# Altium PCB v0.0.1.PcbDoc
Units mm, origin at the board's own origin, x right, y up, seen from the top; angles counter-clockwise.
Board outline 75 x 75 mm, 2 copper layers (Top Layer, Bottom Layer); 65 components, 42 nets, 261 pads, 0 vias.
Unrouted connection lines stored in the file: 170.
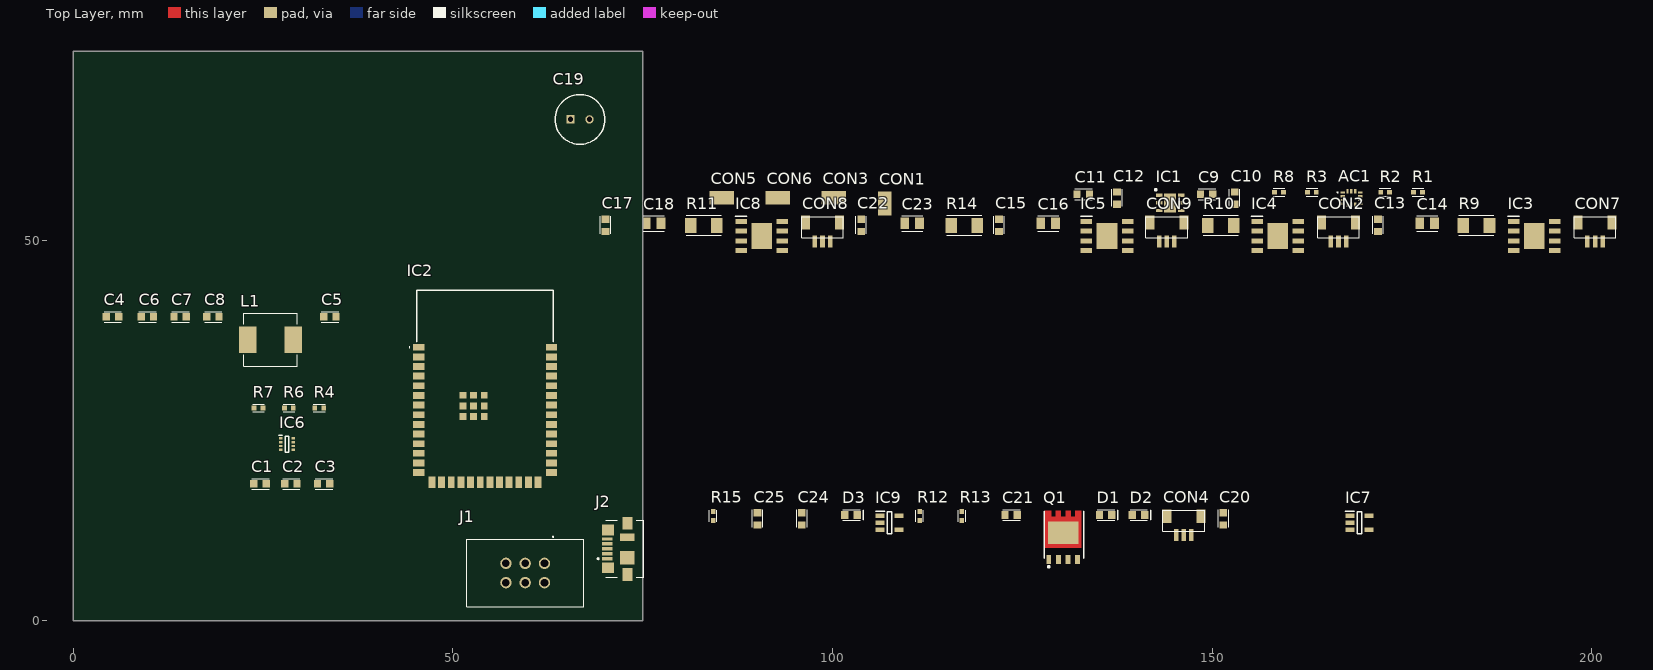
[diagram p0: Top Layer view]
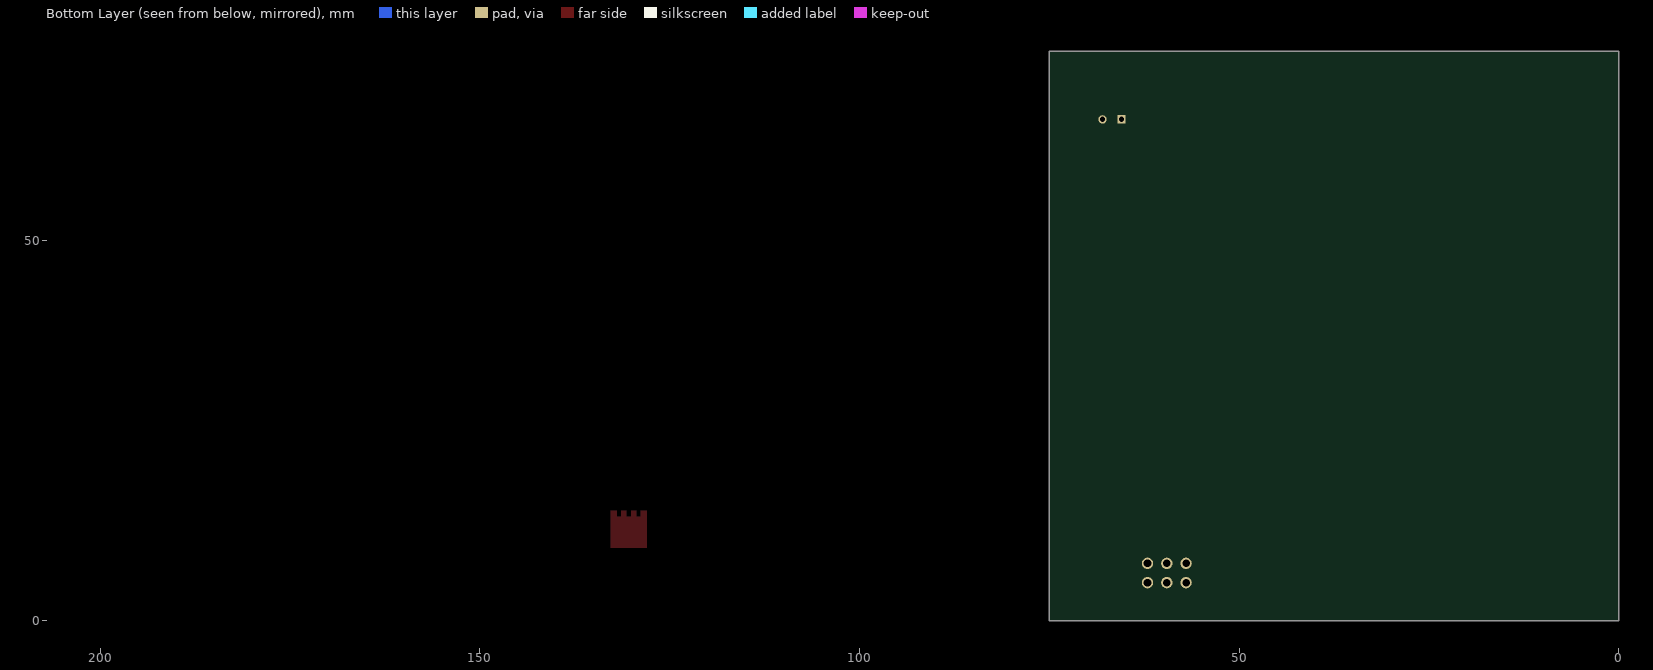
[diagram p1: Bottom Layer view, seen from below]

## Layer stack, top to bottom
Top Solder: solder mask 0.0102, Solder Resist, Dk 3.5
Top Layer: signal copper 0.0356
Dielectric 1: dielectric 0.32, FR-4, Dk 4.8
Bottom Layer: signal copper 0.0356
Bottom Solder: solder mask 0.0102, Solder Resist, Dk 3.5

## Board outline
0,0 75,0 75,75 0,75

## Design rules (kind name [scope] priority, off if disabled: settings)
BoardOutlineClearance [All] p1: gap=0.8 ignorepadtopadclearanceinfootprint=FALSE
Clearance [All] p1: gap=0.127 ignorepadtopadclearanceinfootprint=TRUE except(0.2: Arc-THPad Track-THPad SMDPad-THPad; 0.254: THPad-Fill THPad-Poly THPad-Region Via-Fill Via-Poly Via-Region; 0.33: Arc-Hole Track-Hole SMDPad-Hole THPad-Hole Via-Hole Fill-Hole Poly-Hole Region-Hole; 0.5: THPad-THPad)
HoleSize [All] p1: absolutevalues=TRUE maxlimit=4 minlimit=0.02 maxpercent=80.000 minpercent=20.000
HoleToHoleClearance [All] p1: gap=0.127 allowstackedmicrovias=TRUE
PlaneClearance [All] p1: clearance=0.3
PlaneConnect PlaneConnect_1 [(HasFootprint('R 2512'))] p1: planeconnectstyle=Relief reliefexpansion=0.508 reliefentries=4 reliefconductorwidth=0.254 reliefairgap=0.254
PlaneConnect [All] p2: planeconnectstyle=Relief reliefexpansion=0.508 reliefentries=4 reliefconductorwidth=0.254 reliefairgap=0.254
PolygonConnect "Polygon Power Connection" [(HasFootprint('DFN 5x6')) OR  (HasFootprint('R 2512')) OR  IsVia OR  HasFootprint('SMD PAD')  OR  (HasFootprint('DJNR60454R5FERROCORE'))  OR  (HasFootprint ('SON50P200X200X80-9N-D')) OR (HasFootprint('SOT230P700X180-4N'))  OR    InNetClass('Power')] p1: connectstyle=Direct reliefconductorwidth=0.254 reliefentries=4 polygonreliefangle="90 Angle" airgapwidth=0.254 // Conection to high power components
PolygonConnect [All] p2: connectstyle=Relief reliefconductorwidth=0.254 reliefentries=4 polygonreliefangle="90 Angle" airgapwidth=0.254
RoutingVias [All] p1: holewidth=0.3 width=0.5 viastyle="Through Hole" minholewidth=0.2 minwidth=0.3 maxholewidth=1 maxwidth=1.27
SilkToSilkClearance [All] p1: silktosilkclearance=0.127
SolderMaskExpansion "Tented Vias" [IsVia] p1: expansion=0.102 istentingtop=TRUE
SolderMaskExpansion [All] p2: expansion=0.102 istentingtop=FALSE
Width [All] p1: maxlimit=1 minlimit=0.127 preferedwidth=0.3 minimp=50.000000 maximp=50.000000 favimp=50.000000
25 further rules are at their usual default settings.

## Classes and differential pairs
component class MCU: AC1 C9 C10 C11 C12 CON1 CON3 CON5 CON6 IC2 J1 R1 R2 R3 R8
component class DC_DRIVERS: C13 C14 C15 C16 C17 C18 C22 C23 CON2 CON7 CON8 CON9 IC3 IC4 IC5 IC8 R9 R10 R11 R14
component class DC-DC: C1 C2 C3 C4 C5 C6 C7 C8 C19 C20 C21 C24 C25 CON4 D1 D2 D3 IC6 IC7 IC9 J2 L1 Q1 R4 R6 R7 R12 R13 R15

## Components (designator, comment, footprint, x,y, rotation, side; value= is the part's Value field where it differs from the comment)
AC1 "LSM6DSOXTR" LGA-14_1 168.326,55.635 r0 top
C1 "10uF" "C 0603" 24.618,18 r0 top
C2 "10uF" "C 0603" 28.682,18 r0 top
C3 "100nF" "C 0603" 33,18 r0 top
C4 "33nF" "C 0603" 5.187,40 r0 top
C5 "100nF" "C 0603" 33.813,40 r0 top
C6 "40uF" "C 0603" 9.777,40 r0 top
C7 "40uF" "C 0603" 14.095,40 r0 top
C8 "100nF" "C 0603" 18.413,40 r0 top
C9 "100nF" "C 0603" 149.276,56.143 r0 top
C10 "1uF" "C 0603" 152.959,55.635 r90 top
C11 "1uF" "C 0603" 133.02,56.143 r0 top
C12 "100nF" "C 0603" 137.465,55.635 r90 top
C13 "0.1uF" "C 0603" 171.834,52.048 r90 top
C14 "47uF" "C 0805" 178.311,52.302 r0 top
C15 "0.1uF" "C 0603" 121.923,52.048 r90 top
C16 "47uF" "C 0805" 128.4,52.302 r0 top
C17 "0.1uF" "C 0603" 70.107,52.048 r90 top
C18 "47uF" "C 0805" 76.457,52.302 r0 top
C19 "UVY1V101MED1TD" CAPPRD250W50D655H1250 65.5,66 r0 top
C20 "1uF" "C 0603" 151.467,13.396 r90 top
C21 "2.2uF" "C 0603" 123.527,13.904 r0 top
C22 "0.1uF" "C 0603" 103.762,52.048 r90 top
C23 "47uF" "C 0805" 110.493,52.302 r0 top
C24 "1uF" "C 0603" 95.968,13.396 r90 top
C25 "2.2uF" "C 0603" 90.126,13.396 r90 top
CON1 "1 Pin" "SMD PAD" 106.89,54.925 r0 top
CON2 "3 Pin" BM03B-SRSS-TB 166.627,51.413 r0 top
CON3 "1 Pin" "SMD PAD" 100.159,55.687 r90 top
CON4 "3 Pin" BM03B-SRSS-TB 146.26,12.761 r0 top
CON5 "1 Pin" "SMD PAD" 85.427,55.687 r90 top
CON6 "1 Pin" "SMD PAD" 92.793,55.687 r90 top
CON7 "3 Pin" BM03B-SRSS-TB 200.409,51.413 r0 top
CON8 "3 Pin" BM03B-SRSS-TB 98.682,51.413 r0 top
CON9 "3 Pin" BM03B-SRSS-TB 144.021,51.413 r0 top
D1 "LED BLUE" "LED 0603 BLUE" 135.973,13.904 r0 top
D2 "LED BLUE" "LED 0603 BLUE" 140.291,13.904 r0 top
D3 "LED BLUE" "LED 0603 BLUE" 102.445,13.904 r0 top
IC1 "HDC1080DMBR" SON100P300X300X80-7N-D 144.45,55 r0 top
IC2 "ESP32-S3-WROOM-1-N16R8" ESP32S3WROOM1N16R8 54.25,30.74 r0 top
IC3 "DRV8251DDAR" SOIC127P600X170-9N 192.408,50.651 r0 top
IC4 "DRV8251DDAR" SOIC127P600X170-9N 158.626,50.651 r0 top
IC5 "DRV8251DDAR" SOIC127P600X170-9N 136.147,50.651 r0 top
IC6 "TPS62933DRLR" SOTFL50P160X60-8N 28.162,23.25 r0 top
IC7 "TPS7A2433DBVR" SOT95P280X145-5N 169.374,12.888 r0 top
IC8 "DRV8251DDAR" SOIC127P600X170-9N 90.681,50.651 r0 top
IC9 "TPS7A2433DBVR" SOT95P280X145-5N 107.525,12.888 r0 top
J1 "09185066324" 09185066324 62.08,7.54 r180 top
J2 "0473461001" 0473461001 72.315,9.45 r90 top
L1 "4.7uH" HPI0630 26,37 r0 top
Q1 "AON6403" "DFN 5x6" 130.385,10.983 r0 top
R1 "10k" "R 0402" 177.089,56.397 r0 top
R2 "10k" "R 0402" 172.771,56.397 r0 top
R3 "10k" "R 0402" 163.119,56.397 r0 top
R4 "0" "R 0402" 32.416,28 r0 top
R6 "31.3K" "R 0402" 28.416,28 r0 top
R7 "10K" "R 0402" 24.416,28 r0 top
R8 "10k" "R 0402" 158.801,56.397 r0 top
R9 "0.2" "R 1206" 184.788,52.048 r0 top
R10 "0.2" "R 1206" 151.133,52.048 r0 top
R11 "0.2" "R 1206" 83.061,52.048 r0 top
R12 "2k" "R 0402" 111.462,13.777 r90 top
R13 "160" "R 0402" 117.05,13.777 r90 top
R14 "0.2" "R 1206" 117.351,52.048 r0 top
R15 "160" "R 0402" 84.284,13.777 r90 top

## Footprints (in the part's own frame and the unit in brackets; to place one, negate y for a bottom-side part, rotate by r counter-clockwise, add the part's x,y. Pads: shape width x height; smd on the part's side, far side on the other; paste and mask are expansions set on the pad)
0473461001 [mm]
  rect 0.45x1.38 smd: 1(-1.3,1.975) 2(-0.65,1.975) 3(0,1.975) 4(0.65,1.975) 5(1.3,1.975)
  rect 1.425x1.55 smd: MP1(-2.487,1.89) MP2(2.487,1.89)
  rect 1.65x1.3 smd: MP3(-3.375,-0.685) MP6(3.375,-0.685)
  rect 1.8x1.9 smd: MP4(-1.15,-0.685)
  rect 1x1.9 smd: MP5(1.55,-0.685)
  silkscreen extent -3.75,-2.84 3.75,3.26, body extent -3.9,-2.5 3.9,2.5, height 2.72
09185066324 [mm]
  round 1.5 hole 1: 1(0,0) 2(0,2.54) 3(2.54,0) 4(2.54,2.54) 5(5.08,0) 6(5.08,2.54)
  silkscreen extent -5.16,-3.55 10.24,5.72, body extent -5.16,-3.21 10.24,5.99, height 9.31
BM03B-SRSS-TB [mm]
  rect 0.6x1.6 smd: 1(-1,-1.5) 2(0,-1.5) 3(1,-1.5)
  rect 1.2x1.8 smd: A(-2.25,1) B(2.25,1)
  silkscreen extent -2.75,-1 2.75,1.75, body extent -2.5,-1.9 2.5,1.7, height 4.25
"C 0603" [mil]
  rect 38x39.37 smd: 1(-32,0) 2(32,0)
  silkscreen extent -43,-28 47,28, body extent -31,-16 31,16, height 24
"C 0805" [mil]
  rect 45x59.06 smd: 1(-38,0) 2(38,0)
  silkscreen extent -55,-39 55,39, body extent -39,-25 39,25, height 49
CAPPRD250W50D655H1250 [mm]
  rect 1.1x1.1 hole 0.7: 1(0,0)
  round 1.1 hole 0.7: 2(2.5,0)
  silkscreen extent -2.02,-3.27 4.52,3.27, body extent -2.15,-3.4 4.65,3.4, height 12.5
"DFN 5x6" [mm] "PowerMOSFET"
  rect 0.65x1.2 smd: 1(-1.905,-2.91) 2(-0.635,-2.91) 3(0.635,-2.91) 4(1.905,-2.91)
  rect 4x3 smd: 5_8(0,0.6)
  Top Layer region: -2.4,-1.4 -2.4,3.5 -1.6,3.5 -1.6,2.7 -1,2.7 -1,3.5 -0.3,3.5 -0.3,2.7 0.3,2.7 0.3,3.5 1,3.5 1,2.7 1.6,2.7 1.6,3.5 2.4,3.5 2.4,-1.4
  silkscreen extent -2.5,-4.02 2.7,3.42, body extent -2.5,-3.27 2.5,3.26, height 1.2
ESP32S3WROOM1N16R8 [mm]
  rect 1.5x0.9 smd: 1(-8.75,5.26) 2(-8.75,3.99) 3(-8.75,2.72) 4(-8.75,1.45) 5(-8.75,0.18) 6(-8.75,-1.09) 7(-8.75,-2.36) 8(-8.75,-3.63) 9(-8.75,-4.9) 10(-8.75,-6.17) 11(-8.75,-7.44) 12(-8.75,-8.71) 13(-8.75,-9.98) 14(-8.75,-11.25) 27(8.75,-11.25) 28(8.75,-9.98) 29(8.75,-8.71) 30(8.75,-7.44) 31(8.75,-6.17) 32(8.75,-4.9) 33(8.75,-3.63) 34(8.75,-2.36) 35(8.75,-1.09) 36(8.75,0.18) 37(8.75,1.45) 38(8.75,2.72) 39(8.75,3.99) 40(8.75,5.26)
  rect 0.9x1.5 smd: 15(-6.985,-12.5) 16(-5.715,-12.5) 17(-4.445,-12.5) 18(-3.175,-12.5) 19(-1.905,-12.5) 20(-0.635,-12.5) 21(0.635,-12.5) 22(1.905,-12.5) 23(3.175,-12.5) 24(4.445,-12.5) 25(5.715,-12.5) 26(6.985,-12.5)
  rect 0.9x0.9 smd: 41(-1.5,-2.46) 42(-2.9,-1.06) 43(-2.9,-2.46) 44(-2.9,-3.86) 45(-1.5,-3.86) 46(-0.1,-3.86) 47(-0.1,-2.46) 48(-0.1,-1.06) 49(-1.5,-1.06)
  silkscreen extent -10,5.21 9,12.75, body extent -9,0 9,3.25, height 12.75
HPI0630 [mm] "Power Inductor"
  rect 2.3x3.5 smd: 1(-3,0) 2(3,0)
  silkscreen extent -3.5,-3.5 3.5,3.5, body extent -3.65,-3.35 3.65,3.35, height 2.81
"LED 0603 BLUE" [mil]
  rect 38x39.37 smd: 1(-32,0) 2(32,0)
  silkscreen extent -43,-28 63,28, body extent -31,-16 31,16, height 22
LGA-14_1 [mm]
  rect 0.6x0.3 smd: 1(-1.15,0.75) 2(-1.15,0.25) 3(-1.15,-0.25) 4(-1.15,-0.75) 8(1.15,-0.75) 9(1.15,-0.25) 10(1.15,0.25) 11(1.15,0.75)
  rect 0.3x0.6 smd: 5(-0.5,-0.9) 6(0,-0.9) 7(0.5,-0.9) 12(0.5,0.9) 13(0,0.9) 14(-0.5,0.9)
  silkscreen extent -1.83,0.74 -1.8,0.77, body extent -1.62,-1.25 1.38,1.25, height 0.86
"R 0402" [mm] "0402 resistor Chip"
  rect 0.635x0.6 smd: 1(-0.584,0) 2(0.584,0)
  silkscreen extent -0.76,-0.51 0.76,0.51, body extent -0.5,-0.25 0.5,0.25, height 0.31
"R 1206" [mil]
  rect 60x78.74 smd: 1(-68,0) 2(68,0)
  silkscreen extent -91,-51 89,51, body extent -75,-32 75,31, height 24
"SMD PAD" [mm]
  rect 1.8x3.2 smd: 1(0,0)
SOIC127P600X170-9N [mm]
  rect 1.525x0.65 smd: 1(-2.712,1.905) 2(-2.712,0.635) 3(-2.712,-0.635) 4(-2.712,-1.905) 5(2.712,-1.905) 6(2.712,-0.635) 7(2.712,0.635) 8(2.712,1.905)
  rect 2.71x3.4 smd: 9(0,0)
  silkscreen extent -3.47,2.58 -1.95,2.58, body extent -3,-2.45 3,2.45, height 1.7
SON100P300X300X80-7N-D [mm]
  rect 0.85x0.45 smd: 1(-1.45,1) 2(-1.45,0) 3(-1.45,-1) 4(1.45,-1) 5(1.45,0) 6(1.45,1)
  rect 1.6x2.5 smd: 7(0,0)
  silkscreen extent -2,1.6 -1.75,1.85, body extent -1.55,-1.5 1.55,1.5, height 0.8
SOT95P280X145-5N [mm]
  rect 1.2x0.6 smd: 1(-1.25,0.95) 2(-1.25,0) 3(-1.25,-0.95) 4(1.25,-0.95) 5(1.25,0.95)
  silkscreen extent -1.85,-1.45 0.3,1.5, body extent -1.4,-1.45 1.4,1.45, height 1.2
SOTFL50P160X60-8N [mm]
  rect 0.475x0.3 smd: 1(-0.838,0.75) 2(-0.838,0.25) 3(-0.838,-0.25) 4(-0.838,-0.75) 5(0.838,-0.75) 6(0.838,-0.25) 7(0.838,0.25) 8(0.838,0.75)
  silkscreen extent -1.07,-1.05 0.25,1.15, body extent -0.8,-1.02 0.8,1.08, height 0.6

## Part data
AC1: "Accelerometer", Manufacturer_Name=STMicroelectronics, Mouser Part Number=511-LSM6DSOXTR, Arrow Part Number=LSM6DSOXTR, Arrow Price/Stock=https://www.arrow.com/en/products/lsm6dsoxtr/stmicroelectronics?region=europe, Datasheet Link=https://www.st.com/resource/en/datasheet/lsm6dsox.pdf, Manufacturer_Part_Number=LSM6DSOXTR, Mouser Price/Stock=https://www.mouser.co.uk/ProductDetail/STMicroelectronics/LSM6DSOXTR?qs=l7cgNqFNU1i9dcjzItLpVQ%3D%3D
C1 C2 C3 C4 C5 C6 C7 C8 C9 C10 C11 C12 C13 C14 C15 C16 C17 C18 C20 C21 C22 C23 C24 C25: library part Capacitor, "MLCC Capacitor"
C19: "Capacitor Polarised", Manufacturer_Name=Nichicon, Arrow Part Number=UVY1V101MED1TD, Arrow Price/Stock=https://www.arrow.com/en/products/uvy1v101med1td/nichicon, Datasheet Link=http://nichicon-us.com/english/products/pdfs/e-uvy.pdf, Height=12.5mm, Manufacturer_Part_Number=UVY1V101MED1TD
IC1: "Integrated Circuit", Manufacturer_Name="Texas Instruments", Mouser Part Number=595-HDC1080DMBR, Arrow Part Number=HDC1080DMBR, Arrow Price/Stock=https://www.arrow.com/en/products/hdc1080dmbr/texas-instruments?region=nac, Datasheet Link=http://www.ti.com/lit/gpn/HDC1080, Height=0.8mm, Manufacturer_Part_Number=HDC1080DMBR, Mouser Price/Stock=https://www.mouser.co.uk/ProductDetail/Texas-Instruments/HDC1080DMBR?qs=8%2FmU9qzJpL9OuhPLRSO9Vg%3D%3D
IC2: "Integrated Circuit", Manufacturer_Name="Espressif Systems", Mouser Part Number=356-ESP32S3WRM1N16R8, Datasheet Link=https://www.espressif.com/sites/default/files/documentation/esp32-s3-wroom-1_wroom-1u_datasheet_en.pdf, Height=3.25mm, Manufacturer_Part_Number=ESP32-S3-WROOM-1-N16R8, Mouser Price/Stock=https://www.mouser.co.uk/ProductDetail/Espressif-Systems/ESP32-S3-WROOM-1-N16R8?qs=Li%252BoUPsLEnvQc9gW6AMhZg%3D%3D
IC3 IC4 IC5 IC8: "Integrated Circuit", Manufacturer_Name="Texas Instruments", Mouser Part Number=595-DRV8251DDAR, Arrow Part Number=DRV8251DDAR, Arrow Price/Stock=https://www.arrow.com/en/products/drv8251ddar/texas-instruments?region=nac, Datasheet Link=https://www.arrow.com/en/products/drv8251ddar/texas-instruments?region=nac, Height=1.7mm, Manufacturer_Part_Number=DRV8251DDAR, Mouser Price/Stock=https://www.mouser.co.uk/ProductDetail/Texas-Instruments/DRV8251DDAR?qs=doiCPypUmgHTzZyfapGahQ%3D%3D
IC6: "Integrated Circuit", Manufacturer_Name="Texas Instruments", Mouser Part Number=595-TPS62933DRLR, Arrow Part Number=TPS62933DRLR, Arrow Price/Stock=https://www.arrow.com/en/products/tps62933drlr/texas-instruments?utm_currency=USD&region=nac, Datasheet Link=https://www.ti.com/lit/ds/symlink/tps62933.pdf?ts=1626073394234, Height=0.6mm, Manufacturer_Part_Number=TPS62933DRLR, Mouser Price/Stock=https://www.mouser.co.uk/ProductDetail/Texas-Instruments/TPS62933DRLR?qs=Rp5uXu7WBW9fv47wfQVntQ%3D%3D
IC7 IC9: "Integrated Circuit", Manufacturer_Name="Texas Instruments", Mouser Part Number=595-TPS7A2433DBVR, Arrow Part Number=TPS7A2433DBVR, Arrow Price/Stock=null?region=nac, Datasheet Link=https://www.ti.com/lit/gpn/TPS7A24, Height=1.45mm, Manufacturer_Part_Number=TPS7A2433DBVR, Mouser Price/Stock=https://www.mouser.co.uk/ProductDetail/Texas-Instruments/TPS7A2433DBVR?qs=wnTfsH77Xs7ROpwa%2Fm0jWA%3D%3D
J1: "Connector", Manufacturer_Name=HARTING, Mouser Part Number=617-09185066324, Arrow Part Number=09185066324, Arrow Price/Stock=https://www.arrow.com/en/products/09185066324/harting?utm_currency=USD&region=europe, Datasheet Link=https://b2b.harting.com/files/download/PRD/PDF_DS/PDF_DS_09185066324_EN.pdf, Manufacturer_Part_Number=09185066324, Mouser Price/Stock=https://www.mouser.co.uk/ProductDetail/HARTING/09185066324?qs=qa49y27LPCE%2F3ZplMsKEeQ%3D%3D
J2: "Connector", Manufacturer_Name=Molex, Mouser Part Number=N/A, Arrow Part Number=0473461001, Arrow Price/Stock=https://www.arrow.com/en/products/0473461001/molex?region=nac, Datasheet Link=https://componentsearchengine.com/Datasheets/1/0473461001.pdf, Height=2.45mm, Manufacturer_Part_Number=0473461001, Mouser Price/Stock=https://www.mouser.co.uk/ProductDetail/Molex/0473461001?qs=2bnkQPT%252BPafTZgGVt%2FOGfA%3D%3D
L1: library part Inductor, "General pourpouse inductor"
Q1: "P-Mosfet 30V 67A Rds(on) 3.1mR"
R1 R2 R3 R4 R6 R7 R8 R9 R10 R11 R12 R13 R14 R15: library part Resistor, "General pourpouse resistor"

## Nets (pads, with @x,y where several pads share a name; then routed paths per layer and width w, separated by ;. In a path a pad name is that pad's centre, name@x,y a point inside that pad or via, vN(x,y) a via of type N, cw(c..) or ccw(c..) an arc to the next point about the centre after c; other vN are vias at no path point)
3.3V: AC1.5 AC1.8 AC1.12 C6.1 C7.1 C8.1 C9.1 C10.1 C11.1 C12.1 C21.1 C25.1 D2.1 IC1.5 IC2.2 IC3.4 IC4.4 IC5.4 IC7.5 IC8.4 IC9.5 J1.2 L1.2 R1.2 R2.2 R3.2 R6.1 R8.2
5V: C24.1 D3.1 IC9.1 IC9.3 J2.1
12V: AC1.6 AC1.7 C1.1 C1.2 C2.1 C2.2 C3.1 C3.2 C4.2 C6.2 C7.2 C8.2 C9.2 C10.2 C11.2 C12.2 C13.1 C13.2 C14.1 C14.2 C15.1 C15.2 C16.1 C16.2 C17.1 C17.2 C18.1 C18.2 C19.1 C19.2 C20.1 C20.2 C21.2 C22.1 C22.2 C23.1 C23.2 C24.2 C25.2 CON4.3 D1.1 IC1.2 IC1.7 IC2.1 IC2.40 IC2.41 IC2.42 IC2.43 IC2.44 IC2.45 IC2.46 IC2.47 IC2.48 IC2.49 IC3.1 IC3.5 IC3.9 IC4.1 IC4.5 IC4.9 IC5.1 IC5.5 IC5.9 IC6.3 IC6.4 IC7.1 IC7.2 IC7.3 IC8.1 IC8.5 IC8.9 IC9.2 J1.4 J2.5 J2.MP2 J2.MP3 J2.MP4 J2.MP5 J2.MP6 Q1.1 Q1.2 Q1.3 Q1.4 R7.1 R9.2 R10.2 R11.2 R12.1 R13.1 R14.2 R15.1
EN: CON3.1 IC2.3 J1.1
IO0: CON6.1 IC2.27 J1.6
NetC4_1: C4.1 IC6.7
NetC5_1: C5.1 R4.1
NetC5_2: C5.2 IC6.5 L1.1
NetCON2_1: CON2.1 IC4.8
NetCON2_3: CON2.3 IC4.6
NetCON4_2: CON4.2 Q1.5_8
NetCON7_1: CON7.1 IC3.8
NetCON7_3: CON7.3 IC3.6
NetCON8_1: CON8.1 IC8.8
NetCON8_3: CON8.3 IC8.6
NetCON9_1: CON9.1 IC5.8
NetCON9_3: CON9.3 IC5.6
NetD1_2: D1.2 R12.2
NetD2_2: D2.2 R13.2
NetD3_2: D3.2 R15.2
NetIC3_7: IC3.7 R9.1
NetIC4_7: IC4.7 R10.1
NetIC5_7: IC5.7 R14.1
NetIC6_6: IC6.6 R4.2
NetIC6_8: IC6.8 R6.2 R7.2
NetIC8_7: IC8.7 R11.1
PWM1: IC2.6 IC3.2
PWM2: IC2.7 IC3.3
PWM3: IC2.20 IC4.2
PWM4: IC2.21 IC4.3
PWM5: IC2.18 IC8.2
PWM6: IC2.19 IC8.3
PWM7: IC2.22 IC5.2
PWM8: IC2.23 IC5.3
RXD0: CON5.1 IC2.36 J1.5
SCL: AC1.13 IC2.39 R1.1
SCL_TEMP: IC1.6 IC2.32 R3.1
SDA: AC1.14 IC2.38 R2.1
SDA_TEMP: IC1.1 IC2.31 R8.1
TXD0: CON1.1 IC2.37 J1.3
USB_D+: IC2.14 J2.3
USB_D-: IC2.13 J2.2
pads on no net: AC1.1 AC1.2 AC1.3 AC1.4 AC1.9 AC1.10 AC1.11 CON2.2 CON2.A CON2.B CON4.1 CON4.A CON4.B CON7.2 CON7.A CON7.B CON8.2 CON8.A CON8.B CON9.2 CON9.A CON9.B IC1.3 IC1.4 IC2.4 IC2.5 IC2.8 IC2.9 IC2.10 IC2.11 IC2.12 IC2.15 IC2.16 IC2.17 IC2.24 IC2.25 IC2.26 IC2.28 IC2.29 IC2.30 IC2.33 IC2.34 IC2.35 IC6.1 IC6.2 IC7.4 IC9.4 J2.4 J2.MP1